# Altium PCB PCB1.PcbDoc
Units mil, origin at the board's own origin, x right, y up, seen from the top; angles counter-clockwise.
Board outline 3720 x 1320 mil, 2 copper layers (Top Layer, Bottom Layer), stack 63 mil thick; 37 components, 16 nets, 113 pads, 11 vias.
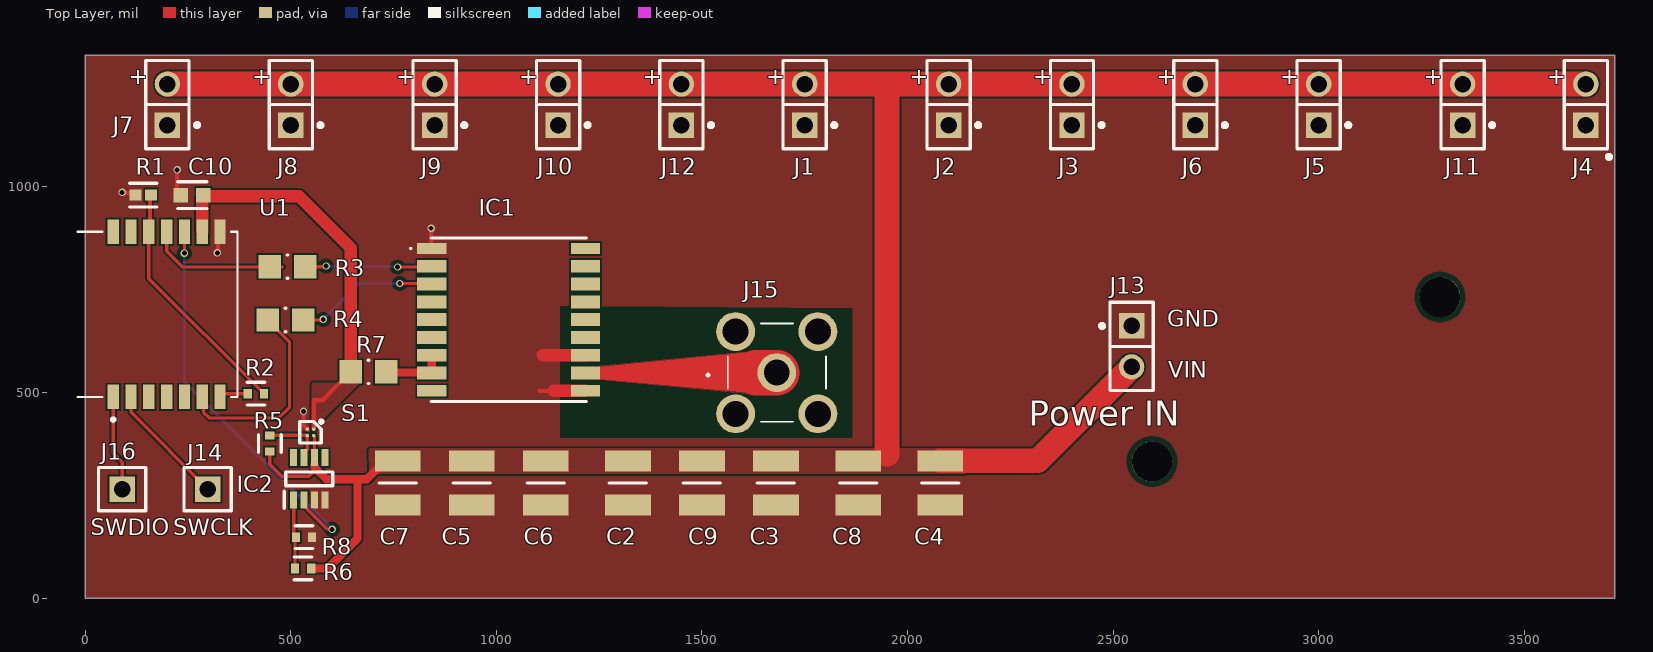
[diagram p0: Top Layer view]
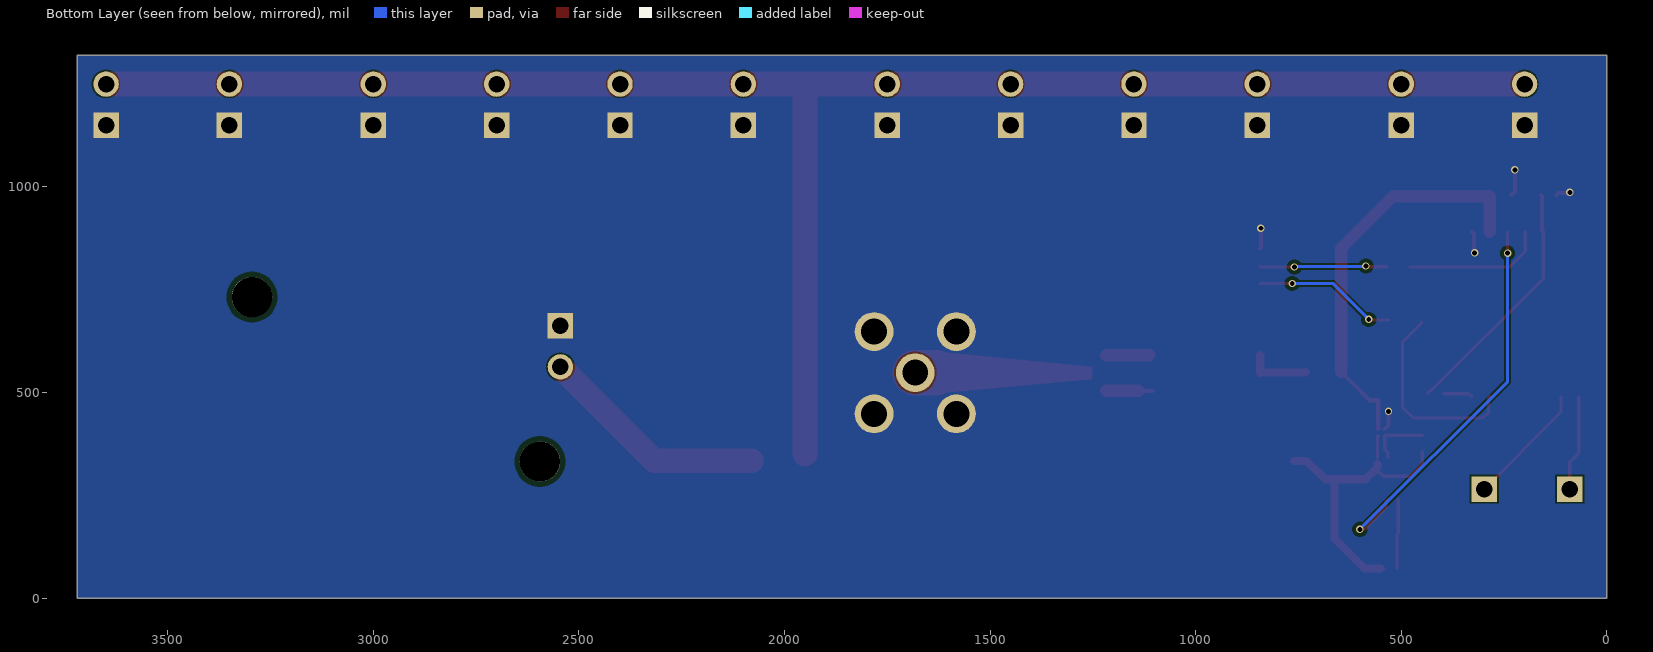
[diagram p1: Bottom Layer view, seen from below]
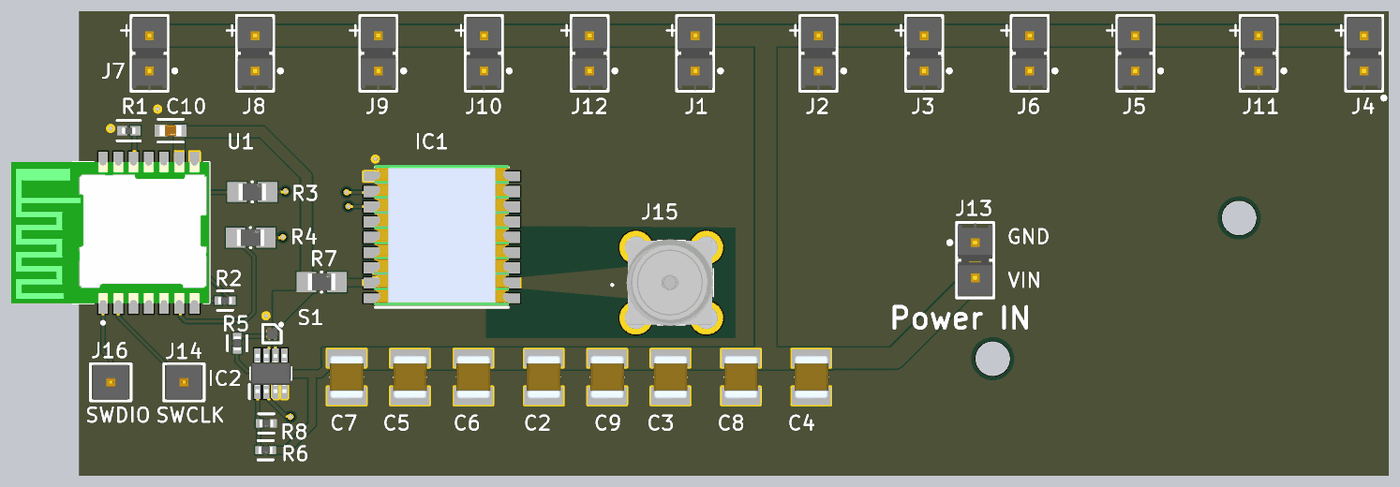
[diagram p2: 3D render of the assembled board from above, using the file's embedded part models]

## Layer stack, top to bottom
Top Solder: solder mask 0.4, Solder Resist, Dk 3.8
Top Layer: signal copper 1.4
Dielectric 1: dielectric 60.2, FR-4, Dk 4.5
Bottom Layer: signal copper 1.4
Bottom Solder: solder mask 0.4, Solder Resist, Dk 3.8

## Board outline
0,0 3720,0 3720,1320 0,1320

## Design rules (kind name [scope] priority, off if disabled: settings)
Clearance Clearance_All [All] p1: gap=4 ignorepadtopadclearanceinfootprint=TRUE except(6: SMDPad-SMDPad; 12: Arc-Hole Track-Hole SMDPad-Hole THPad-Hole Via-Hole Fill-Hole Poly-Hole Region-Hole Text-Hole)
HoleSize [All] p1: absolutevalues=TRUE maxlimit=248 minlimit=6 maxpercent=80.000 minpercent=20.000
HoleToHoleClearance [All] p1: gap=8 allowstackedmicrovias=TRUE
MinimumSolderMaskSliver [All] p1 off: minsoldermaskwidth=4
PolygonConnect J22_Shield_Thermal [IsPad And InComponent('J22') And InNet('GND')] p1: connectstyle=Relief reliefconductorwidth=10 reliefentries=2 polygonreliefangle="90 Angle" airgapwidth=10
PolygonConnect [All] p2: connectstyle=Direct reliefconductorwidth=10 reliefentries=4 polygonreliefangle="90 Angle" airgapwidth=10
RoutingVias [All] p1: holewidth=7.87 width=13.78 viastyle="Through Hole" minholewidth=5.91 minwidth=9.84 maxholewidth=248.03 maxwidth=259.84 viatemplateguid#1={7CD660F0-3084-4002-849E-F9D3F3D2032F} viatemplatename#1=v45h30(1)
SilkToSilkClearance [All] p1 off: silktosilkclearance=6
SilkToSolderMaskClearance [IsPad] p1 off: minsilkscreentomaskgap=6 clearancetoexposedcopper=FALSE
SolderMaskExpansion [All] p1: expansion=4 istentingtop=FALSE
SupplyNets "Schematic Supply Nets_6" [InNet('+2V5')] p1: voltage=0.000
SupplyNets "Schematic Supply Nets_16" [InNet('GND')] p2: voltage=0.000
SupplyNets "Schematic Supply Nets_4" [InNet('+5')] p3: voltage=0.000
Width Widthall [All] p1: maxlimit=500 minlimit=4 preferedwidth=10
25 further rules are at their usual default settings.

## Components (designator, comment, footprint, x,y, rotation, side; value= is the part's Value field where it differs from the comment)
C2 "1210 100uF 10V" CAPC3225X280N 1320,280 r270 top
C3 "1210 100uF 10V" CAPC3225X280N 1680,280 r270 top
C4 "1210 100uF 10V" CAPC3225X280N 2080,280 r270 top
C5 "1210 100uF 10V" CAPC3225X280N 940,280 r270 top
C6 "1210 100uF 10V" CAPC3225X280N 1120,280 r270 top
C7 "1210 100uF 10V" CAPC3225X280N 760,280 r270 top
C8 "1210 100uF 10V" CAPC3225X280N 1880,280 r270 top
C9 "1210 100uF 10V" CAPC3225X280N 1500,280 r270 top
C10 "0603 10uF 25V" FP-CC0603-DC-MFG 260,980 r180 top
IC1 "MAX-M10S-00B" MAXM10S00B 1030,677 r180 top
IC2 "LTC2955ITS8-1#TRMPBF" SOT65P280X100-8N 545,290 r90 top
J1 "TSW-102-14-G-S" FP-TSW-102-14-G-S-MFG 1750,1200 r90 top
J2 "TSW-102-14-G-S" FP-TSW-102-14-G-S-MFG 2100,1200 r90 top
J3 "TSW-102-14-G-S" FP-TSW-102-14-G-S-MFG 2400,1200 r90 top
J4 "TSW-102-14-G-S" FP-TSW-102-14-G-S-MFG 3650,1200 r90 top
J5 "TSW-102-14-G-S" FP-TSW-102-14-G-S-MFG 3000,1200 r90 top
J6 "TSW-102-14-G-S" FP-TSW-102-14-G-S-MFG 2700,1200 r90 top
J7 "TSW-102-14-G-S" FP-TSW-102-14-G-S-MFG 200,1200 r90 top
J8 "TSW-102-14-G-S" FP-TSW-102-14-G-S-MFG 500,1200 r90 top
J9 "TSW-102-14-G-S" FP-TSW-102-14-G-S-MFG 850,1200 r90 top
J10 "TSW-102-14-G-S" FP-TSW-102-14-G-S-MFG 1150,1200 r90 top
J11 "TSW-102-14-G-S" FP-TSW-102-14-G-S-MFG 3350,1200 r90 top
J12 "TSW-102-14-G-S" FP-TSW-102-14-G-S-MFG 1450,1200 r90 top
J13 "Power In" FP-TSW-102-14-G-S-MFG 2545,612 r270 top
J14 "SCL_USB_Power" FP-TSW-101-07-L-S-MFG 298,265 r0 top
J15 "SMA Connector" 733910070 1682,548 r90 top
J16 "SCL_USB_Power" FP-TSW-101-07-L-S-MFG 90,265 r0 top
R1 "10kΩ 3380K 0402" FP-NCP15-NCU15-0_05-IPC_A 141.16,980 r0 top
R2 "10k 0402" FP-RMCF0402-MFG 415,497 r0 top
R3 "0 Ohm 0805" FP-HCJ0805-MFG 492,806 r0 top
R4 "0 Ohm 0805" FP-HCJ0805-MFG 487.19,676 r0 top
R5 "1M 0402" FP-RMCF0402-MFG 449,376 r90 top
R6 "3M 0402" FP-RMCF0402-MFG 530,72 r0 top
R7 "0 Ohm 0805" FP-HCJ0805-MFG 689,550 r0 top
R8 "1M 0402" FP-RMCF0402-MFG 532,148 r0 top
S1 "TPS22916BYFPR" BGA4C40P2X2_78X78X50 548,402.89 r270 top
U1 "BC805M" XCVR_BC805M 89,690 r90 top

## Footprints (in the part's own frame and the unit in brackets; to place one, negate y for a bottom-side part, rotate by r counter-clockwise, add the part's x,y. Pads: shape width x height; smd on the part's side, far side on the other; paste and mask are expansions set on the pad)
733910070 [mm]
  round 2.4 hole 1.6: 1(0,0) 2(-2.54,2.54) 3(-2.54,-2.54) 4(2.54,-2.54) 5(2.54,2.54)
  silkscreen extent -3.04,-3.04 3.04,4.3, body extent -3.11,-3.02 3.13,3.22, height 9.9
BGA4C40P2X2_78X78X50 [mm]
  round 0.226 smd: A1(-0.2,0.2) A2(0.2,0.2) B1(-0.2,-0.2) B2(0.2,-0.2)
  silkscreen extent -0.76,-0.66 0.66,0.76, body extent -0.39,-0.39 0.39,0.39, height 0.5
CAPC3225X280N [mm]
  rect 1.3x2.82 smd: 1(-1.36,0) 2(1.36,0)
  silkscreen extent 0,-1.15 0,1.15, body extent -1.6,-1.25 1.6,1.25, height 2.8
FP-CC0603-DC-MFG [mm]
  rect 0.9x0.9 smd paste+0 mask+0: 1(-0.7,0) 2(0.7,0)
  silkscreen extent -0.9,-0.82 0.9,0.82, body extent -1.35,-0.75 1.35,0.75, height 0.25
FP-HCJ0805-MFG [mm]
  rect 1.4x1.44 smd paste+0 mask+0: 1(-1.1,0) 2(1.1,0)
  silkscreen extent -0.03,-0.73 0.03,0.73, body extent -1.9,-0.82 1.9,0.82, height 0.25
FP-NCP15-NCU15-0_05-IPC_A [mil]
  rect 28.16x26.48 smd paste+0 mask+0: 1(-18.84,0) 2(18.84,0)
  silkscreen extent -33,-29 33,29, body extent -41,-21 41,21, height 10
FP-RMCF0402-MFG [mm]
  rect 0.5x0.6 smd paste+0 mask+0: 1(-0.5,0) 2(0.5,0)
  silkscreen extent -0.55,-0.7 0.55,0.7, body extent -0.85,-0.4 0.85,0.4, height 0.25
FP-TSW-101-07-L-S-MFG [mm]
  rect 1.57x1.57 hole 1.02 paste-2539.97 mask+0: 1(0,0)
  silkscreen extent -1.46,-1.34 1.46,1.34, body extent -1.56,-1.44 1.56,1.44, height 0.25
FP-TSW-102-14-G-S-MFG [mm]
  rect 1.57x1.57 hole 1.02 paste-2539.97 mask+0: 1(-1.27,0)
  round 1.57 hole 1.02 paste-2539.97 mask+0: 2(1.27,0)
  silkscreen extent -2.73,-1.95 2.73,1.34, body extent -2.83,-1.44 2.83,1.44, height 0.25
MAXM10S00B [mm]
  rect 1.8x0.7 smd: 1(4.75,-4.4) 9(4.75,4.4) 10(-4.75,4.4) 18(-4.75,-4.4)
  rect 1.8x0.8 smd: 2(4.75,-3.3) 3(4.75,-2.2) 4(4.75,-1.1) 5(4.75,0) 6(4.75,1.1) 7(4.75,2.2) 8(4.75,3.3) 11(-4.75,3.3) 12(-4.75,2.2) 13(-4.75,1.1) 14(-4.75,0) 15(-4.75,-1.1) 16(-4.75,-2.2) 17(-4.75,-3.3)
  silkscreen extent -4.8,-5.05 6.1,5.05, body extent -4.85,-5.19 4.85,4.91, height 2.43
SOT65P280X100-8N [mm]
  rect 1.05x0.45 smd: 1(-1.3,0.975) 2(-1.3,0.325) 3(-1.3,-0.325) 4(-1.3,-0.975) 5(1.3,-0.975) 6(1.3,-0.325) 7(1.3,0.325) 8(1.3,0.975)
  silkscreen extent -1.82,-1.45 0.42,1.55, body extent -1.4,-1.45 1.4,1.45, height 1
XCVR_BC805M [mm]
  rect 1.5x0.7 smd: 1(-5.1,0.53) 2(-5.1,-0.57) 3(-5.1,-1.67) 4(-5.1,-2.77) 5(-5.1,-3.87) 6(-5.1,-4.97) 7(-5.1,-6.07) 8(5.1,-6.07) 9(5.1,-4.97) 10(5.1,-3.87) 11(5.1,-2.77) 12(5.1,-1.67) 13(5.1,-0.57) 14(5.1,0.53)
  silkscreen extent -6.6,-7.15 5.1,2.75, body extent -5.1,-7.15 5.1,7.15, height 1.9

## Part data
C2 C3 C4 C5 C6 C7 C8 C9: library part CL32A107MPVNNNE, "C23742", Manufacturer_Name=SAMSUNG, Mouser Part Number=187-CL32A107MPVNNNE, Arrow Part Number=CL32A107MPVNNNE, Arrow Price/Stock=https://www.arrow.com/en/products/cl32a107mpvnnne/samsung-electro-mechanics?region=nac, Datasheet Link=http://uk.rs-online.com/web/p/products/7661179, Height=2.8mm, Manufacturer_Part_Number=CL32A107MPVNNNE, Mouser Price/Stock=https://www.mouser.co.uk/ProductDetail/Samsung-Electro-Mechanics/CL32A107MPVNNNE?qs=X6jEic%2FHinBwGsPYz57S5w%3D%3D
C10: library part CMP-00621-81932632-1, "C96446", Capacitance=10µF, Case/Package=0603, Dielectric=X5R, Max Operating Temperature=85°C, Min Operating Temperature=-55°C, Tolerance=10%, Voltage Rating=16V, Halogen Free="Halogen Free", Height=1mm, Lead Free="Lead Free", Material=Ceramic, NexarPartId=81932632, RoHS=Non-Compliant, Voltage Rating (DC)=16V
IC1: "C4153167", Manufacturer_Name=u-blox, Mouser Part Number=377-MAX-M10S-00B, Arrow Part Number=MAX-M10S-00B, Arrow Price/Stock=https://www.arrow.com/en/products/max-m10s-00b/u-blox.html?utm_currency=USD&region=nac, Datasheet Link=https://content.u-blox.com/sites/default/files/MAX-M10S_IntegrationManual_UBX-20053088.pdf, Height=2.7mm, Manufacturer_Part_Number=MAX-M10S-00B, Mouser Price/Stock=https://www.mouser.co.uk/ProductDetail/u-blox/MAX-M10S-00B?qs=A6eO%252BMLsxmT0PfQYPb7LLQ%3D%3D
IC2: "C473668", Manufacturer_Name="Analog Devices", Mouser Part Number=584-C2955ITS8-1TMPF, Arrow Part Number=LTC2955ITS8-1#TRMPBF, Arrow Price/Stock=https://www.arrow.com/en/products/ltc2955its8-1trmpbf/analog-devices?utm_currency=USD&region=europe, Datasheet Link=https://datasheet.datasheetarchive.com/originals/distributors/Datasheets-SFU1/DSASFU10008450.pdf, Height=1mm, Manufacturer_Part_Number=LTC2955ITS8-1#TRMPBF, Mouser Price/Stock=https://www.mouser.co.uk/ProductDetail/Analog-Devices/LTC2955ITS8-1TRMPBF?qs=hVkxg5c3xu8PYYnw8mp%252BwA%3D%3D
J1 J2 J3 J4 J5 J6 J7 J8 J9 J10 J11 J12 J13: library part CMP-02766-001740-1, "CONN HEADER VERT 2POS 2.54MM", Color=Black, Flammability Rating="UL94 V-0", Max Current Rating=7.6A, Max Operating Temperature=125°C, Max Voltage Rating (AC)=550V, Min Operating Temperature=-55°C, Package Quantity=1, Connector Type=Header, Contact Finish - Mating=GOLD, Contact Material=Bronze, Contact Mating Length=0.32inch, Contact Plating=Gold, Contact Shape=Square, Contact Type="Male Pin", Depth=2.54mm, Fastening Type=Pull, Gender=Male, Housing Color=Black, Housing Material=Polyester, Insulation Color=Black, Insulation Material=PBT, Lead Free="Lead Free", Length=5.08mm, Mount="Through Hole", Number of Contacts=2, Number of Positions=2, Number of Rows=1, Orientation=Straight, Packaging=Bulk, Pitch=2.54mm, Radiation Hardening=No, REACH SVHC="No SVHC", RoHS Compliant=Yes, Series=TSW, Termination=Solder, Width=2.54mm
J14 J16: library part CMP-02766-001775-1, "CONN HEADER VERT 1POS", Color=Black, Flammability Rating="UL94 V-0", Max Current Rating=7.6A, Max Operating Temperature=125°C, Max Voltage Rating (AC)=550V, Min Operating Temperature=-55°C, Connector Type=Header, Contact Finish - Mating=GOLD, Contact Material=Bronze, Contact Mating Length=0.23inch, Contact Plating=Gold, Contact Shape=Square, Contact Type="Male Pin", Depth=2.54mm, Fastening Type=Pull, Gender=Male, Housing Color=Black, Housing Material=Polyester, Insulation Color=Black, Insulation Material=PBT, Lead Free="Lead Free", Length=2.54mm, Mount="Through Hole", Number of Contacts=1, Number of Positions=1, Number of Rows=1, Orientation=Straight, Packaging=Bulk, Radiation Hardening=No, Reach SVHC Compliant=Yes, RoHS Compliant=Yes, Series=TSW, Termination=Solder, Width=2.54mm
J15: library part 73391-0070, "C588470", Manufacturer_Name=Molex, Mouser Part Number=538-73391-0070, Datasheet Link=https://datasheet.datasheetarchive.com/originals/distributors/Datasheets_SAMA/cd6bf19b0e4973497e5cb3fc39017d1b.pdf, Height=10mm, Manufacturer_Part_Number=73391-0070, Mouser Price/Stock=https://www.mouser.co.uk/ProductDetail/Molex/73391-0070?qs=Vtbn2VVmZzEJo591qvlOmw%3D%3D
R1: library part CMP-06022-000215-2, "C178739"
R2 R5 R6 R8: library part CMP-26527-002093-1, "C25744", Case/Package=0402, Max Operating Temperature=155°C, Max Power Dissipation=63mW, Min Operating Temperature=-55°C, Resistance=3.9R, Resistor Type="Thick Film", Temperature Coefficient=200ppm/°C, Tolerance=5%, Contact Plating=Tin, Features="Automotive AEC-Q200", Height=0.016inch, Length=0.039inch, Mount="Surface Mount", Number of Terminations=2, Packaging="Tape and Reel", Radiation Hardening=No, RoHS Compliant=Yes, Series=RMCF, Width=0.02inch
R3 R4 R7: library part CMP-26527-000104-1, "C17477", Case Code (Imperial)=0805, Case Code (Metric)=2012, Max Operating Temperature=155°C, Min Operating Temperature=-55°C, Package Quantity=1, Resistance=0mR, Case/Package=0805, Height=0.026inch, Lead Free="Lead Free", Length=0.079inch, Mount="Surface Mount", Number of Terminations=2, Packaging="Tape and Reel", Radiation Hardening=No, RoHS Compliant=Yes, Termination=Wraparound, Width=0.049inch
S1: "Switch", Manufacturer_Name="Texas Instruments", Mouser Part Number=595-TPS22916BYFPR, Arrow Part Number=TPS22916BYFPR, Arrow Price/Stock=https://www.arrow.com/en/products/tps22916byfpr/texas-instruments?region=europe, Datasheet Link=http://www.ti.com/lit/gpn/tps22916, Height=0.5mm, Manufacturer_Part_Number=TPS22916BYFPR, Mouser Price/Stock=https://www.mouser.co.uk/ProductDetail/Texas-Instruments/TPS22916BYFPR?qs=EU6FO9ffTwcHQneHYjMKrg%3D%3D
U1: "Bluetooth Bluetooth v5.2 Transceiver Module 2.4GHz PCB Trace Surface Mount", Package="SMD-14 Fanstel Corp.", Availability="In Stock", Check_prices=https://www.snapeda.com/parts/BC805M/Fanstel+Corp./view-part/?ref=eda, MF="Fanstel Corp.", MP=BC805M, Price=None, Purchase-URL=https://pricing.snapeda.com/search/part/BC805M/?ref=eda, SnapEDA_Link=https://www.snapeda.com/parts/BC805M/Fanstel+Corp./view-part/?ref=snap

## Free pads (board coordinates)
  round 98.43 hole 98.43 unplated paste-99999 mask+1.97: 2(2595,332) 2(3295,732)

## Via types
v1: diameter 18, hole 12, Top Layer to Bottom Layer, 11 vias

## Nets (pads, with @x,y where several pads share a name; then routed paths per layer and width w, separated by ;. In a path a pad name is that pad's centre, name@x,y a point inside that pad or via, vN(x,y) a via of type N, cw(c..) or ccw(c..) an arc to the next point about the centre after c; other vN are vias at no path point)
GND: C2.2 C3.2 C4.2 C5.2 C6.2 C7.2 C8.2 C9.2 C10.2 IC1.1 IC1.10 IC1.12 IC2.3 IC2.4 J1.1 J2.1 J3.1 J4.1 J5.1 J6.1 J7.1 J8.1 J9.1 J10.1 J11.1 J12.1 J13.1 J15.2 J15.3 J15.4 J15.5 R1.1 R8.2 S1.B1 U1.8 | length 467.8
  Top Layer w10: v1(89.63,986.4) 91.16,984.87 117.45,984.87 R1.1 ; v1(223.47,1041.4) 223.47,988.97 C10.2 ; v1(321.47,839.4) 323,840.93 323,885.81 U1.8 ; v1(531,454) 531,419.89 S1.B1 ; v1(841.47,899.4) 841.47,851.75 IC1.1 ; 1104.77,503.77 1139,503.77
  Top Layer w30: 1113,591 1113.61,590.39 IC1.12 ; 1139,503.77 IC1.10
NetIC1_2: IC1.2 R3.2 | length 308.6
  Top Layer w8: R3.2 v1@585,806 ; v1(760,805) 841.07,805 IC1.2
  Bottom Layer w8: v1(585.98,807.54) 587.25,806.27 758.73,806.27 v1(760,805)
NetIC1_3: IC1.3 R4.2 | length 348.3
  Top Layer w8: R4.2 v1@578,676 ; v1(765,765) 841.61,765 IC1.3
  Bottom Layer w8: v1(578.98,677.54) 666.44,765 v1(765,765)
NetIC1_7: IC1.7 IC1.8 R7.2 | length 155.2
  Top Layer w20: R7.2 733.77,548.54 841.53,548.54 IC1.8 IC1.7
NetIC1_11: IC1.11 J15.1 | length 49.7
  Top Layer w110: 1632.25,548 J15.1
NetIC2_1: IC2.1 R6.1 R8.1 | length 168.4
  Top Layer w8: IC2.1 506.96,238.47 506.96,158 510.32,154.65 R6.1
NetIC2_2: IC2.2 U1.10 | length 979.6
  Top Layer w8: v1(241.36,838.64) U1.10 ; IC2.2 537.06,233.96 537.06,218.71 587.83,167.95 599.63,167.95 v1(600.58,167)
  Bottom Layer w8: v1(241.36,838.64) 241.36,526.22 v1(600.58,167)
NetIC2_7: IC2.7 R5.2 S1.B2 | length 148.5
  Top Layer w8: R5.2 539.22,395.68 S1.B2@539.88,395.02 ; IC2.7 532.2,352.99 539.88,360.67 539.88,394.14 539.95,394.21 539.95,394.95 S1.B2@539.88,395.02 ; S1.B2 S1.B2@539.88,395.02
NetJ14_1: J14.1 U1.2 | length 301.5
  Top Layer w8: U1.2 111.44,451.56 J14.1
NetJ16_1: J16.1 U1.1 | length 233.3
  Top Layer w8: U1.1 68.13,351.87 90,330 J16.1
NetR1_2: R1.2 R2.2 U1.12 | length 602.3
  Top Layer w8: U1.12 154.75,776.94 426.87,504.81 428.84,504.81 434.68,498.97 R2.2
  Top Layer w10: U1.12 157.37,893.41 157.37,977.37 R1.2
NetR2_1: R2.1 U1.7 | length 70.6
  Top Layer w8: U1.7 335.76,497 R2.1
NetR3_1: R3.1 U1.11 | length 344.6
  Top Layer w8: U1.11 198.05,843.95 237,805 448.69,805 479.69,805
NetR4_1: R4.1 U1.6 | length 490.3
  Top Layer w8: U1.6 287.63,486.25 287.63,452.37 302,438 471,438 497,464 497,622.1 450.71,668.39 R4.1@450.71,671
VIN: C2.1 C3.1 C4.1 C5.1 C6.1 C7.1 C8.1 C9.1 IC2.6 J1.2 J2.2 J3.2 J4.2 J5.2 J6.2 J7.2 J8.2 J9.2 J10.2 J11.2 J12.2 J13.2 R5.1 R6.2 S1.A2 | length 5664.8
  Top Layer w8: R5.1 449,325 478,296 544,296 557.8,309.8 IC2.6@557.8,325.49 ; S1.A2 555.87,394.78 557.8,392.86 IC2.6
  Top Layer w20: R6.2 589,72 662,145 662,289 ; IC2.6@557.8,325.49 557.8,317.45 586.24,289 662,289 ; C7.1 730.08,333.54 685.53,289 662,289
  Top Layer w60: J7.2 J8.2 J9.2 J10.2 J12.2 J1.2 1950,1250 ; 1950,350 1950,1250 ; C4.1 2316.54,333.54 J13.2 ; J4.2 J5.2 J6.2 J3.2 J2.2 1950,1250
Vout: C10.1 R7.1 S1.A1 U1.9 | length 973.3
  Top Layer w10: S1.A1 555.87,480.87 576.57,480.87 622.35,526.65 623.13,526.65 633.91,537.43 R7.1@633.91,538.22
  Top Layer w30: U1.9 284.67,977.11 284.84,977.28 304.5,977.28 304.67,977.11 519.89,977.11 645.69,851.31 R7.1
pads on no net: IC1.4 IC1.5 IC1.6 IC1.9 IC1.13 IC1.14 IC1.15 IC1.16 IC1.17 IC1.18 IC2.5 IC2.8 U1.3 U1.4 U1.5 U1.13 U1.14

## Polygon pours and split planes (outlines as drawn)
GND on Bottom Layer "NONET_L-01_P-001" (solid, pour order 1): 40,1295 60,1275 3660,1275 3660,35 3640,55 40,55
GND on Bottom Layer "NONET_L-01_P-001" (solid, pour order 0): 0,1320 3720,1320 3720,0 0,0
VIN on Top Layer "NONET_L-01_P-001" (solid, pour order 4): 690.88,303.12 692,302 2140.61,302 2140.61,361 2141.61,362 2139.61,364 689.61,364
GND on Top Layer "NONET_L-01_P-001" (solid, pour order 6): 0.09,1320 0.09,0 3720,0 3720,1320
Vout on Top Layer "NONET_L-01_P-001" (solid, pour order 3): 551.48,406.37 669.11,524 550.57,524
NetIC1_11 on Top Layer "NONET_L-01_P-001" (solid, pour order 2): 1251,563 1251,532 1609,498 1610,499 1610,598 1252,564 1252,563

## Other copper
Top Layer:
  region net NetIC1_11: 1251,563 1251,532 1610,499 1610,598 1251,563 1251.5,563
  pour cut-out: 1155,710 1155,390 1865,390 1865,705

## Silkscreen, mask and mechanical layers (free items; w line width, h text height)
Top Overlay:
  text "+" at 106,1249.34 h40
  text "+" at 406,1249.34 h40
  text "+" at 756,1249.34 h40
  text "+" at 1056,1249.34 h40
  text "+" at 1356,1249.34 h40
  text "+" at 1656,1249.34 h40
  text "+" at 2006,1249.34 h40
  text "+" at 2306,1249.34 h40
  text "+" at 2606,1249.34 h40
  text "+" at 2906,1249.34 h40
  text "+" at 3256,1249.34 h40
  text "+" at 3556,1249.34 h40
  text "GND" at 2632,660 h40
  text "VIN" at 2634,536 h40
  text "Power IN" at 2295,419 h60
  text "SWDIO" at 14,153 h40
  text "SWCLK" at 214,153 h40

## Text inside footprints (layer, text, board x,y; h text height)
U1: Mechanical 13 "PCB EDGE" at -26.16,898.66 h50 r90